# Altium PCB PCB_PowerSupply7805.PcbDoc
Units mil, origin at the board's own origin, x right, y up, seen from the top; angles counter-clockwise.
Board outline 2585 x 910 mil, 2 copper layers (Top Layer, Bottom Layer); 10 components, 5 nets, 22 pads, 1 vias.
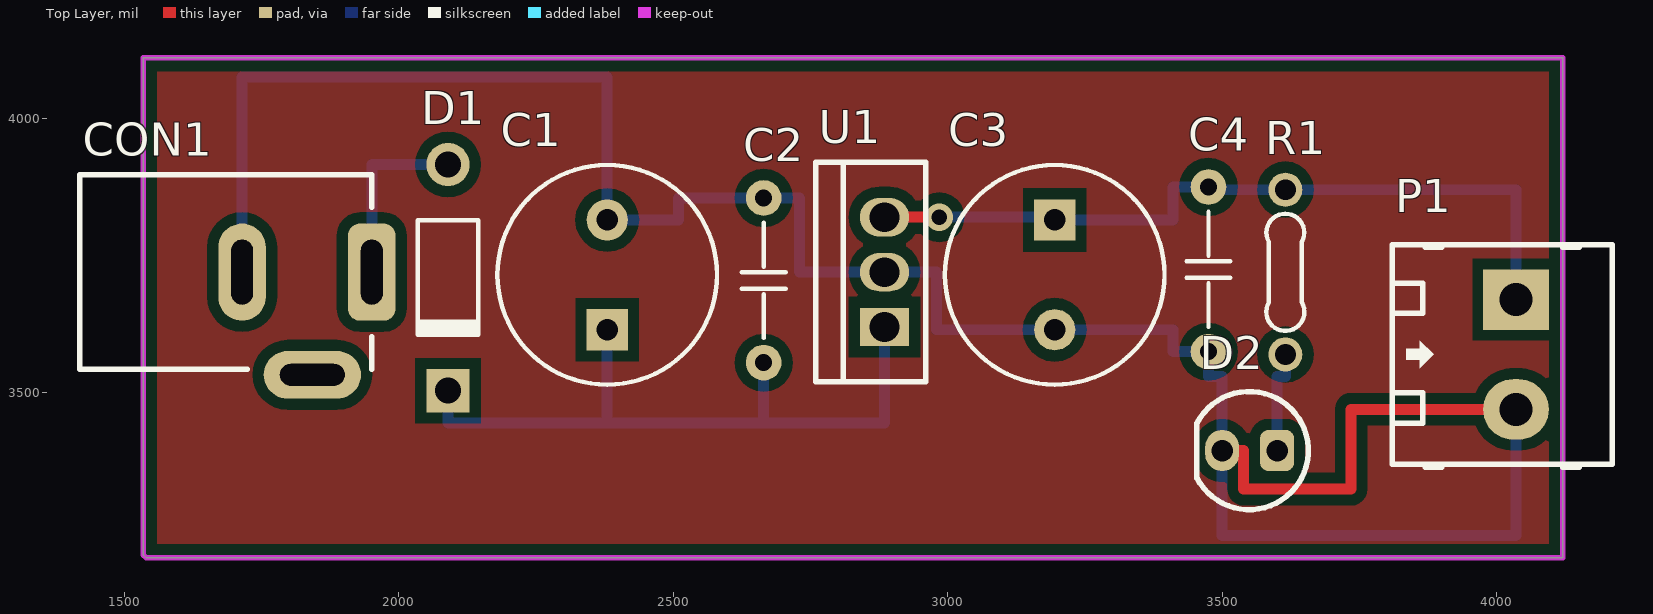
[diagram p0: Top Layer view]
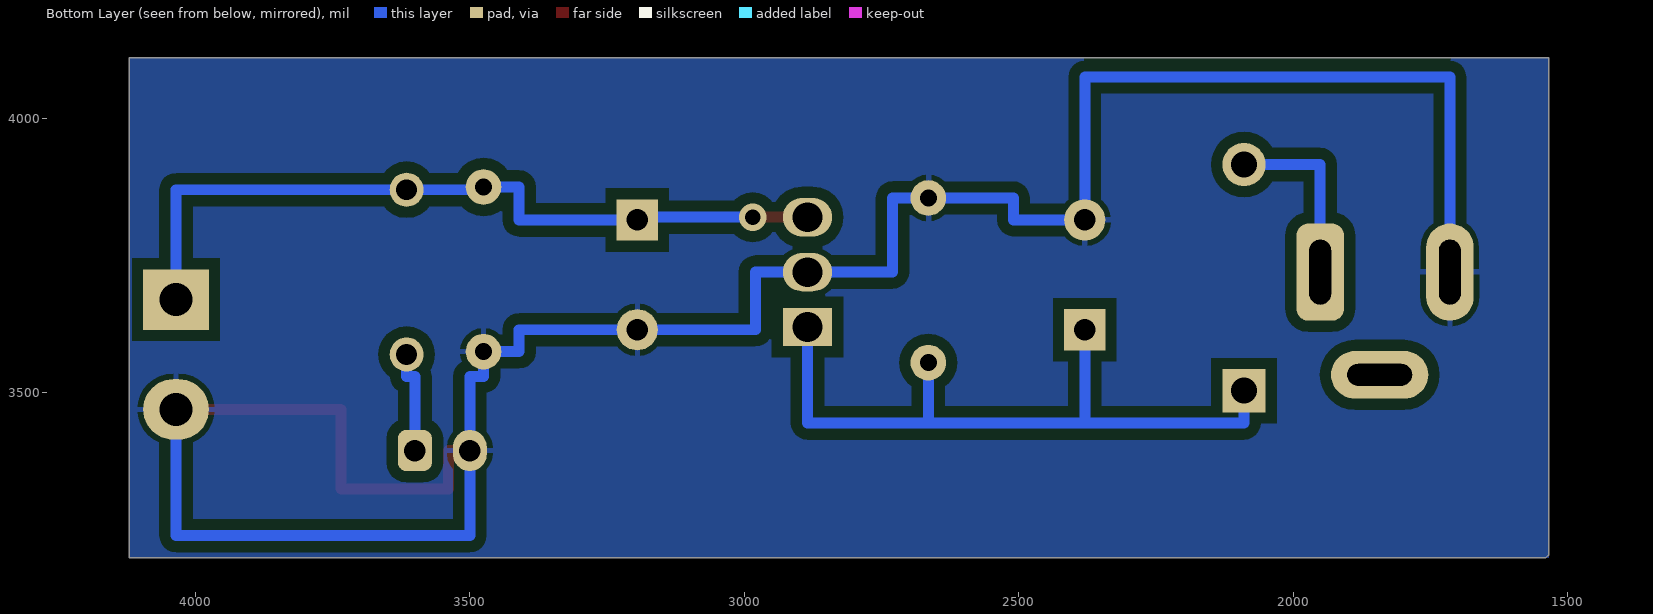
[diagram p1: Bottom Layer view, seen from below]
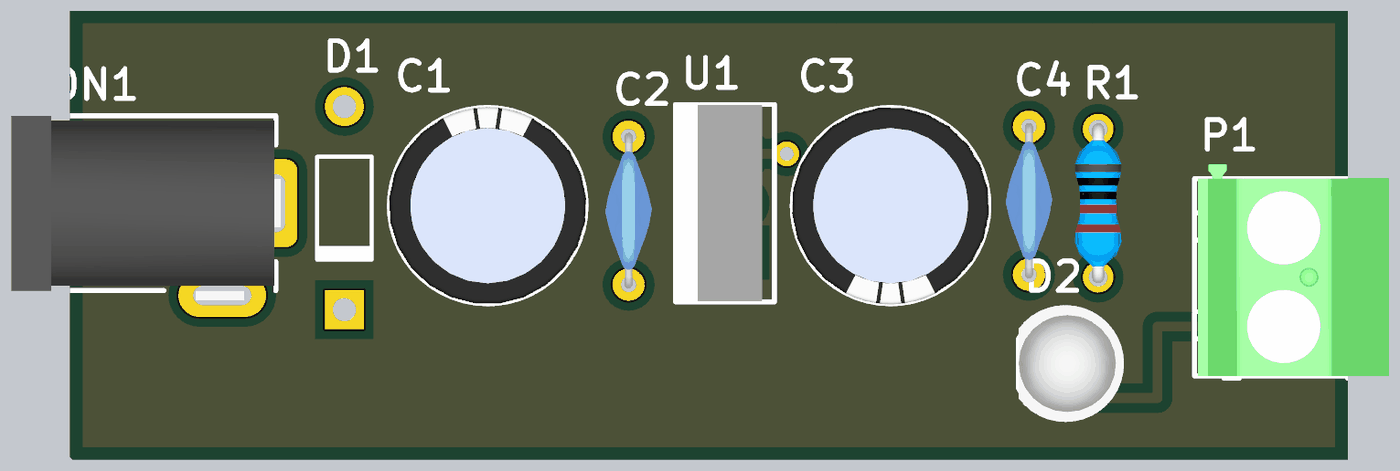
[diagram p2: 3D render of the assembled board from above, using the file's embedded part models]

## Layer stack, top to bottom
Top Solder: solder mask 0.4, Solder Resist, Dk 3.5
Top Layer: signal copper 1.4
Dielectric 1: dielectric 12.6, FR-4, Dk 4.8
Bottom Layer: signal copper 1.4
Bottom Solder: solder mask 0.4, Solder Resist, Dk 3.5

## Board outline
1540,3200 1535,3205 1535,4110 4120,4110 4120,3200

## Design rules (kind name [scope] priority, off if disabled: settings)
Clearance [All] p1: gap=20 ignorepadtopadclearanceinfootprint=FALSE
PolygonConnect [All] p1: connectstyle=Relief reliefconductorwidth=10 reliefentries=4 polygonreliefangle="90 Angle" airgapwidth=10
RoutingVias [All] p1: holewidth=28 width=50 viastyle="Through Hole" minholewidth=28 minwidth=50 maxholewidth=28 maxwidth=50
SolderMaskExpansion [All] p1: expansion=4
Width [All] p1: maxlimit=100 minlimit=20 preferedwidth=40
30 further rules are at their usual default settings.

## Components (designator, comment, footprint, x,y, rotation, side; value= is the part's Value field where it differs from the comment)
C1 "1000uF" CYL/D.400/LS.200 2380,3715 r90 top
C2 "104" "CAP Ceramic/W300" 2665,3555 r90 top
C3 "1000uF" CYL/D.400/LS.200 3195,3715 r270 top
C4 "104" "CAP Ceramic/W300" 3475,3875 r270 top
CON1 "CON DC PWR" CONN/DC/PWR/5.0MM 1951.22,3720 r0 top
D1 "1N4007" DO-41 2090,3710 r270 top
D2 "Led" "LED 5MM - RED" 3550,3395 r180 top
P1 "Header 2" HDR/Terminal/2 4035,3570 r270 top
R1 "1k" "R 1/4W/300" 3615,3870 r270 top
U1 "78xx" TO-220 2885,3620 r90 top

## Footprints (in the part's own frame and the unit in brackets; to place one, negate y for a bottom-side part, rotate by r counter-clockwise, add the part's x,y. Pads: shape width x height; smd on the part's side, far side on the other; paste and mask are expansions set on the pad)
"CAP Ceramic/W300" [mil]
  round 65 hole 31: 1(0,0) 2(300,0)
  silkscreen extent 45,-40 255,40, body extent -8,-47 307,47, height 340
CONN/DC/PWR/5.0MM [mm]
  rrect50% 2.2x4.5 hole 1 slot 3 at 90 deg: 1(0,0)
  oval 2.2x4.5 hole 1 slot 3 at 90 deg: 2(-6,0)
  oval 4.5x2.2 hole 1 slot 3 at 0 deg: 3(-2.75,-4.75)
  silkscreen extent -13.5,-4.5 0,4.5, body extent -13.58,-5 0.25,4.5, height 11.02
CYL/D.400/LS.200 [mil]
  rect 75x75 hole 39: 1(-100,0)
  round 75 hole 39: 2(100,0)
  silkscreen extent -200,-200 200,200, body extent -198,-199 200,199, height 500
DO-41 [mm] "Diode, Axial; Body 5.2 x 2.7 mm (LxDia. max), Lead Dia. 0.86 mm (max)"
  round 2 hole 1.2: 1(-5.23,0)
  rect 2x2 hole 1.2: 2(5.23,0)
  silkscreen extent -2.65,-1.4 2.75,1.4
HDR/Terminal/2 [mil] "Header 2, 2 pin, hight 400mil, Pin to Pin 200mil, Colour Green"
  rect 110x120 hole 60: 1(-100,0)
  oval 110x120 hole 60: 2(100,0)
  silkscreen extent -200,-225 205,175, body extent -229,-218 200,168, height 559
"LED 5MM - RED" [mil]
  rrect50% 62x75 hole 39: 1(-50,0)
  oval 62x75 hole 39: 2(50,0)
  silkscreen extent -107,-108 96,108, body extent -117,-118 96,119, height 340
"R 1/4W/300" [mil] "Through hole resitor, axial 300mils, 1/4W"
  round 62 hole 38: 1(0,0) 2(300,0)
  silkscreen extent 44,-35 257,35, body extent -12,-47 312,47, height 97
TO-220 [mil]
  rect 70x90 hole 54: 1(0,0)
  oval 70x90 hole 54: 2(100,0) 3(200,0)
  silkscreen extent -100,-75 300,125, body extent -100,-50 300,130, height 730

## Part data
C1 C3: library part Capacitor, "Capacitor pol"
C2 C4: library part "Capacitor NP", "Capacitor non-pol"
CON1: "DC input connector"
D1: library part Diode, "Default Diode"
D2: "Typical LED"
P1: "Header, 2-Pin"
R1: library part Resistor, "Resistor"
U1: "LDO Fixed Voltage regulator"

## Via types
v1: diameter 50, hole 28, Top Layer to Bottom Layer, 1 vias

## Nets (pads, with @x,y where several pads share a name; then routed paths per layer and width w, separated by ;. In a path a pad name is that pad's centre, name@x,y a point inside that pad or via, vN(x,y) a via of type N, cw(c..) or ccw(c..) an arc to the next point about the centre after c; other vN are vias at no path point)
+5: C3.1 C4.1 P1.1 R1.1 U1.3 | length 1425
  Top Layer w20: U1.3 v1(2985,3820) ; C3.1 C3.1@3195,3820
  Bottom Layer w20: v1(2985,3820) 3195,3820 C3.1 3410,3815 3410,3875 C4.1 3475,3870 R1.1 4035,3870 P1.1
GND: C1.2 C2.2 C3.2 C4.2 CON1.2 D2.2 P1.2 U1.2 | length 4570
  Top Layer w20: D2.2 3539,3395 3539,3325 3735,3325 3735,3470 P1.2
  Bottom Layer w20: CON1.2 1715,4075 2380,4075 C1.2 2510,3815 2510,3855 C2.2 2730,3855 2730,3720 U1.2 2980,3720 2980,3615 C3.2 3410,3615 3410,3575 C4.2 3475,3530 3500,3530 D2.2 3500,3240 4035,3240 P1.2
NetC1_1: C1.1 C2.1 D1.2 U1.1 | length 1309.1
  Bottom Layer w20: D1.2 2090,3445 2380,3445 ; C1.1 2380,3445 ; C2.1 2665,3445 ; U1.1 2885,3445 2665,3445 ; 2380,3445 2665,3445
NetCON1_1: CON1.1 D1.1 | length 334.7
  Bottom Layer w20: CON1.1 1951.22,3915.91 D1.1
NetD2_1: D2.1 R1.2 | length 190
  Bottom Layer w20: D2.1 3600,3530 3615,3530 R1.2
pads on no net: CON1.3

## Polygon pours and split planes (outlines as drawn)
no net on Bottom Layer (solid, pour order 2): 1535,4110
GND on Bottom Layer (solid, pour order 0): 1535,4110 4120,4110 4120,3200 1535,3200
GND on Top Layer (solid, pour order 10): 1535,4110 4120,4110 4120,3200 1535,3200
no net on Top Layer (solid, pour order 6): 1630,4090
no net on Top Layer (solid, pour order 4): 1535,4110 4120,4110 4120,3200 1535,3200

## Keep-outs
Top Layer:
  the board outline again, w10